# EAGLE board W5200 Ethernet Shield (EAGLE 6.1)
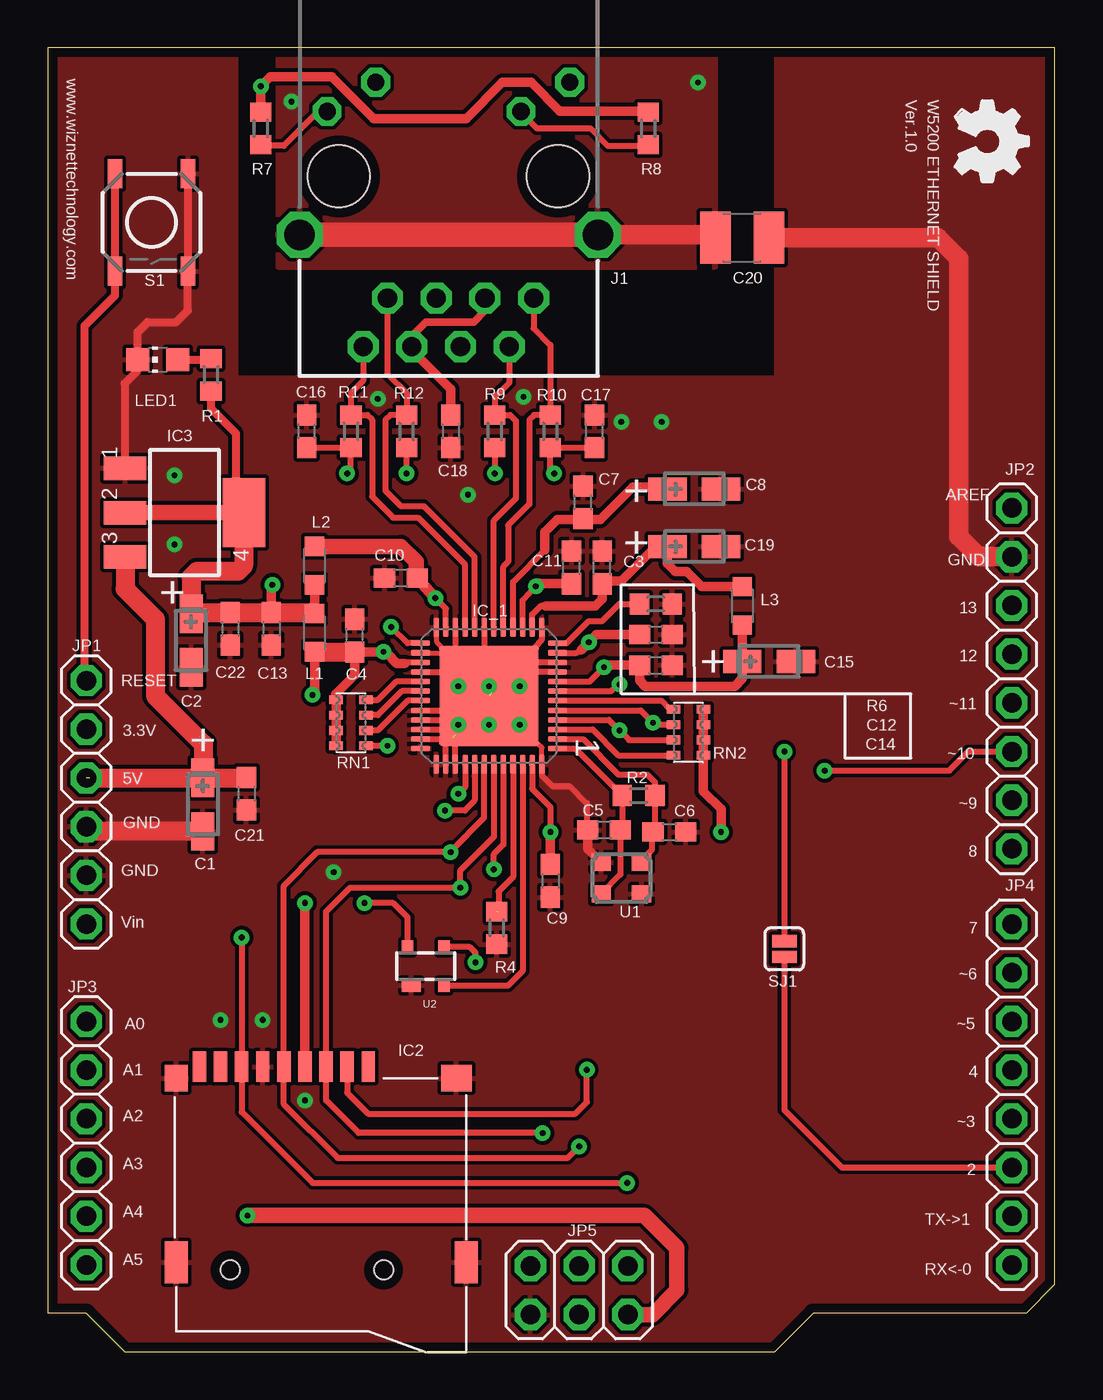
[diagram p0: board, top side]
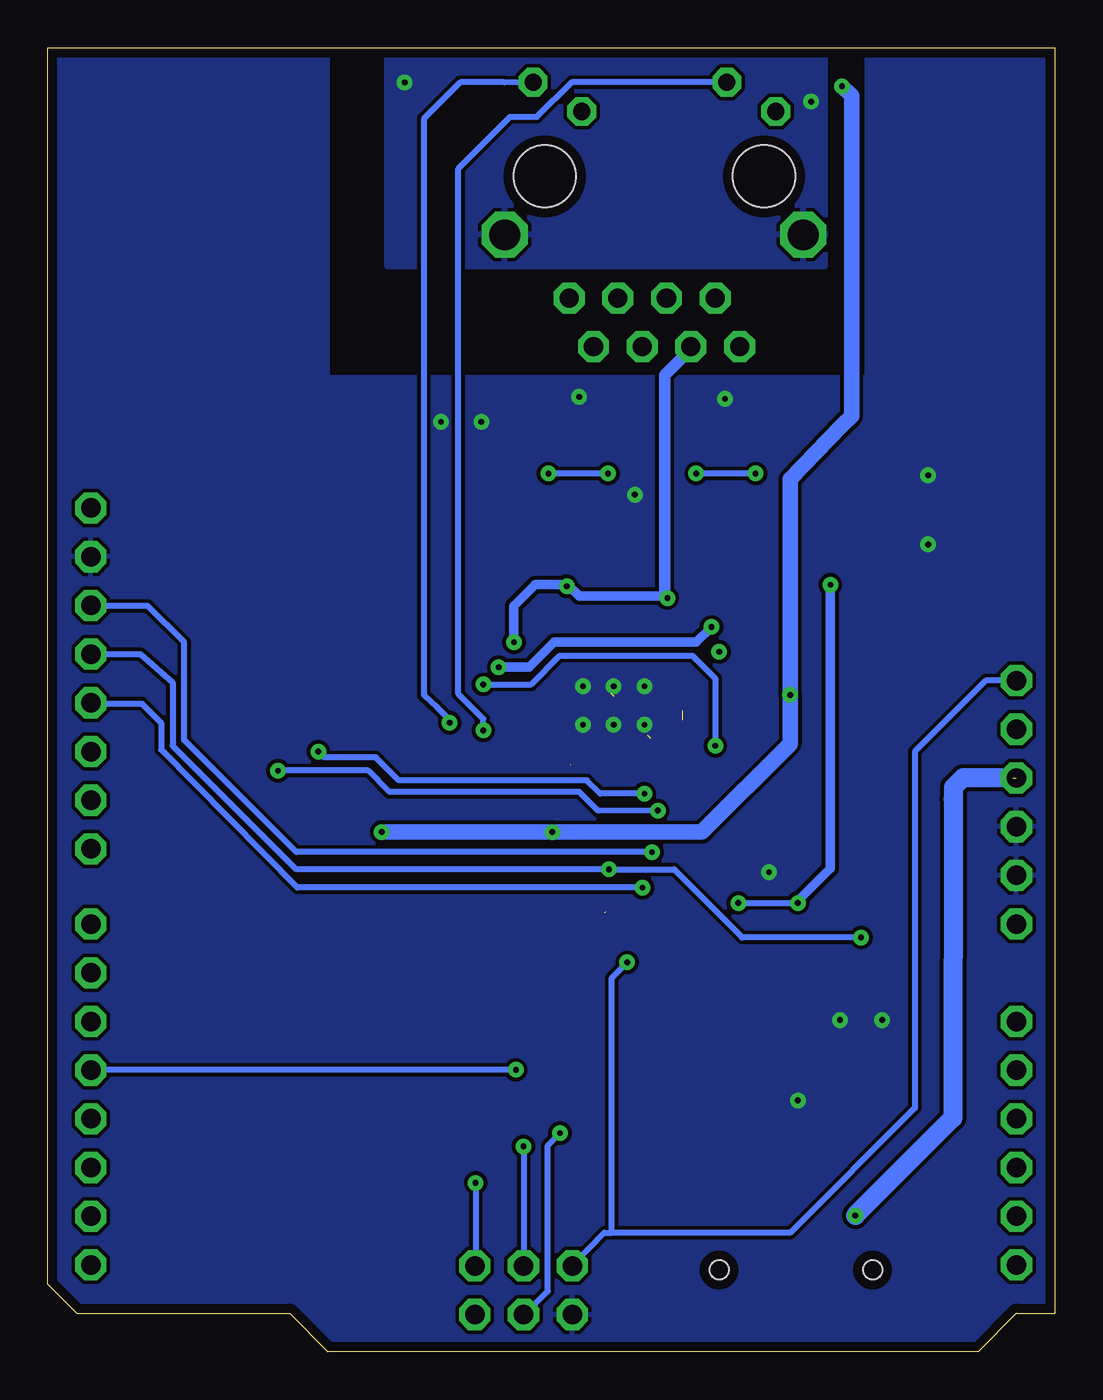
[diagram p1: board, bottom side, seen from below]

Size 52.5 x 68 mm. Coordinates in mm from the lower left corner, seen from the top.
Outline: 4,0 37.9,0 39.9,2 51,2 52.5,3.5 52.5,68 0,68 0,2 2,2 4,0
Copper layers (1*16): Top 0.035mm / dielectric 1.5mm / Bottom 0.035mm
Design rules: minimum track width 8mil, minimum drill 4mil, track to track 0.2mm, track to pad 0.2mm, pad to pad 0.5mm, via to via 0.3mm, smd to smd 6mil, copper to edge 0.5mm, drill to drill 8mil, minimum pad ring 12mil, minimum via ring 10mil, stop-mask expansion 0mil, vias tented up to drill 25mil, thermal gap 0.2mm
Net classes: 0 default: width 0.3 mm, drill 0.3 mm; 1 power: width 0.5 mm, drill 0.5 mm

## Footprints (pad centres in the part's own frame; a part is rotated, then mirrored left to right if it is on the bottom)
CT3216 = smd 2 x 1.2: + -1.4,0; - 1.4,0
C0603 = smd 1.1 x 1: 1 -0.85,0; 2 0.85,0
C3225 = smd 1.6 x 2.7: 1 -1.4,0; 2 1.4,0
MSD_SYMBOL_MSDPAC = smd 0.7 x 1.6: 1 0,0; 2 1.1,0; 3 2.2,0; 4 3.3,0; 5 4.4,0; 6 5.5,0; 7 6.6,0; 8 7.7,0; 9 8.8,0 | smd 1.2 x 1.4: 10 -1.2,-0.6 | smd 1.6 x 1.4: 11 13.4,-0.6 | smd 1.2 x 2.2: 12 13.9,-10.2; 13 -1.2,-10.2 | hole 1: 9.6,-10.6; 1.6,-10.6
SOT223 = smd 1.219 x 2.235: 1 -2.311,-3.099; 2 0,-3.099; 3 2.311,-3.099 | smd 3.6 x 2.2: 4 0,3.099
QFN48 = smd 1 x 0.3: 1 -3.575,2.75; 2 -3.575,2.25; 3 -3.575,1.75; 4 -3.575,1.25; 5 -3.575,0.75; 6 -3.575,0.25; 7 -3.575,-0.25; 8 -3.575,-0.75; 9 -3.575,-1.25; 10 -3.575,-1.75; 11 -3.575,-2.25; 12 -3.575,-2.75; 25 3.575,-2.75; 26 3.575,-2.25; 27 3.575,-1.75; 28 3.575,-1.25; 29 3.575,-0.75; 30 3.575,-0.25; 31 3.575,0.25; 32 3.575,0.75; 33 3.575,1.25; 34 3.575,1.75; 35 3.575,2.25; 36 3.575,2.75 | smd 0.3 x 1: 13 -2.75,-3.575; 14 -2.25,-3.575; 15 -1.75,-3.575; 16 -1.25,-3.575; 17 -0.75,-3.575; 18 -0.25,-3.575; 19 0.25,-3.575; 20 0.75,-3.575; 21 1.25,-3.575; 22 1.75,-3.575; 23 2.25,-3.575; 24 2.75,-3.575; 37 2.75,3.575; 38 2.25,3.575; 39 1.75,3.575; 40 1.25,3.575; 41 0.75,3.575; 42 0.25,3.575; 43 -0.25,3.575; 44 -0.75,3.575; 45 -1.25,3.575; 46 -1.75,3.575; 47 -2.25,3.575; 48 -2.75,3.575 | smd 5.2 x 5.2: EXP 0,0
W5200-ETHERNET-SHIELD_CADNIX_PLACEMENT2_WIZNET_EAGLE_LIB_0.1_MAGJACK = drill 1 pad 1.422 octagon: 1 3.175,17.445; 2 4.445,19.985; 3 5.715,17.445; 4 6.985,19.985; 5 8.255,17.445; 6 9.525,19.985; 7 10.795,17.445; 8 12.065,19.985 | drill 0.89 pad 1.27 octagon: 9 13.945,7.715; 10 11.405,6.195; 11 3.835,7.715; 12 1.295,6.195 | drill 1.6 pad 2.184 octagon: M1 -0.18,14.15; M2 15.38,14.15 | hole 3.25: 1.905,11.095; 13.335,11.095
1X06 = drill 1.016 octagon: 1 -6.35,0; 2 -3.81,0; 3 -1.27,0; 4 1.27,0; 5 3.81,0; 6 6.35,0
1X08 = drill 1.016 octagon: 1 -8.89,0; 2 -6.35,0; 3 -3.81,0; 4 -1.27,0; 5 1.27,0; 6 3.81,0; 7 6.35,0; 8 8.89,0
2X03 = drill 1.016 octagon: 1 -2.54,-1.27; 2 -2.54,1.27; 3 0,-1.27; 4 0,1.27; 5 2.54,-1.27; 6 2.54,1.27
L2012C = smd 1 x 1: 1 -1,0; 2 1,0
CHIP-LED0805 = smd 1.2 x 1.2: A 0,-1.05; C 0,1.05
R0603 = smd 1 x 1.1: 1 -0.85,0; 2 0.85,0
EXBV8V = smd 0.45 x 0.7: 1 -1.2,-0.775; 2 -0.4,-0.775; 3 0.4,-0.775; 4 1.2,-0.775; 5 1.2,0.775; 6 0.4,0.775; 7 -0.4,0.775; 8 -1.2,0.775
TACTILE_SWITCH_SMD = smd 1.524 x 0.762: 1 -2.54,1.905; 2 2.54,1.905; 3 -2.54,-1.905; 4 2.54,-1.905
SJ_2S = smd 0.635 x 1.27: 1 -0.412,0; 2 0.412,0
CRYSTAL = smd 1 x 0.9: 1 -1.05,-0.825; 2 1.05,-0.825; 3 1.05,0.825; 4 -1.05,0.825
SOT143 = smd 1 x 0.7: 1 -0.75,-1 | smd 0.6 x 0.7: 2 0.95,-1; 3 0.95,1; 4 -0.95,1

## Placement (x,y rotation side)
C1  10uF/10V  [CT3216]  8.08,28.53 270 top
C2  10uF/16V  [CT3216]  7.46,37.09 270 top
C3  0.1uF  [C0603]  28.9,40.9 90 top
C4  0.1uF  [C0603]  16,37.35 90 top
C5  18pF  [C0603]  29,27.2 180 top
C6  18pF  [C0603]  32.4,27.1 0 top
C7  0.1uF  [C0603]  27.9,44.3 90 top
C8  10uF/16V (Tantal)  [CT3216]  33.7,45 0 top
C9  0.1uF  [C0603]  26.2,24.55 270 top
C10  0.1uF  [C0603]  18.4,40.35 180 top
C11  0.1uF  [C0603]  27.3,40.9 90 top
C12  0.1uF  [C0603]  31.7,37.4 0 top
C13  0.1uF  [C0603]  11.65,37.7 270 top
C14  0.1uF  [C0603]  31.7,35.8 0 top
C15  10uF/16V (Tantal)  [CT3216]  37.6,36 0 top
C16  0.1uF  [C0603]  13.5,48 90 top
C17  0.1uF  [C0603]  28.5,48 90 top
C18  0.1uF  [C0603]  21,48 270 top
C19  10uF/16V (Tantal)  [CT3216]  33.7,42 0 top
C20  1000pF  [C3225]  36.2,58.1 0 top
C21  1uF  [C0603]  10.35,29.1 270 top
C22  1uF  [C0603]  9.5,37.7 270 top
IC2  MICROSD  [MSD_SYMBOL_MSDPAC]  7.9,14.86 0 top
IC3  LM1117-3.3  [SOT223]  7.12,43.76 270 top
IC_1  W5200  [QFN48]  23,34.2 180 top
J1  MAGJACK  [W5200-ETHERNET-SHIELD_CADNIX_PLACEMENT2_WIZNET_EAGLE_LIB_0.1_MAGJACK]  28.5,72.4 180 top
JP1  Header 6x1  [1X06]  2,28.65 270 top
JP2  Header 8x1  [1X08]  50.26,35.11 90 top
JP3  Header 6x1  [1X06]  2,10.87 270 top
JP4  Header 8x1  [1X08]  50.26,13.41 90 top
JP5  [2X03]  27.7,3.2 180 top
L1  HH-1M1608-121JT  [L2012C]  13.9,37.5 270 top
L2  HH-1M1608-121JT  [L2012C]  13.9,41 90 top
L3  HH-1M1608-121JT  [L2012C]  36.2,38.9 270 top
LED1  SMD RED  [CHIP-LED0805]  5.73,51.74 90 top
R1  200  [R0603]  8.5,50.95 270 top
R2  1M  [R0603]  30.8,29 0 top
R4  10K  [R0603]  23.4,22.1 270 top
R6  28.7K/1%  [R0603]  31.7,39 0 top
R7  200  [R0603]  11.1,63.8 270 top
R8  200  [R0603]  31.3,63.8 270 top
R9  49.9  [R0603]  23.3,48 270 top
R10  49.9  [R0603]  26.2,48 270 top
R11  49.9  [R0603]  15.8,48 270 top
R12  49.9  [R0603]  18.7,48 270 top
RN1  10K  [EXBV8V]  15.8,32.8 90 top
RN2  10K  [EXBV8V]  33.4,32.3 270 top
S1  [TACTILE_SWITCH_SMD]  5.4,58.9 270 top
SJ1  SOLDERJUMPERNC  [SJ_2S]  38.4,21 90 top
U1  25Mhz  [CRYSTAL]  29.9,24.7 0 top
U2  MIC811SU  [SOT143]  19.7,20.1 0 top
U$1  [OSHW_FILLX150_NOTEXT]  47.3,65.25 270 top

## Library data of the parts
C1-C22 L1-L3 = rcl
IC2 = _SRAW5200 Ethernet shield_CADNIX_placement2_1
IC3 = linear
IC_1 = 2012-11-07_WIZnet_5_11_0
J1 = W5200 Ethernet shield_CADNIX_placement2_1
JP1-JP5 = pinhead
LED1 = led
R1 R2 R4 R6-R12 = resistor
RN1 RN2 = resistor-dil; OC_FARNELL: unknown; OC_NEWARK: unknown
S1 SJ1 U2 = SparkFun
U1 = 2012-11-07_WIZnet_5_11_0; OC_FARNELL: unknown; OC_NEWARK: unknown
U$1 = OSHW

## Nets
+3V3 [power]: C2.+ C13.1 C22.1 IC2.6 IC3.2 IC3.4 L1.1 L2.1 R1.2 U2.4
+5V [power]: C1.+ C21.1 IC3.3 JP1.3 JP5.2
/INT: IC_1.40 SJ1.2
/LINK_LED: IC_1.5 J1.12 RN2.2
/RST: IC_1.46 U2.2
/SCS: IC_1.41 JP2.3
/SPD_LED: IC_1.4 J1.10 RN2.3
/SS_SD: IC2.8 JP4.5
GND [power]: C1.- C2.- C3.2 C4.2 C5.2 C6.2 C7.2 C8.- C9.2 C10.2 C11.2 C12.2 C13.2 C14.2 C15.- C16.2 C17.2 C18.2 C19.- C20.2 C21.2 C22.2 IC2.4 IC2.10 IC2.11 IC2.12 IC2.13 IC3.1 IC_1.9 IC_1.10 IC_1.13 IC_1.19 IC_1.22 IC_1.24 IC_1.26 IC_1.28 IC_1.32 IC_1.33 IC_1.34 IC_1.35 IC_1.36 IC_1.37 IC_1.38 IC_1.39 IC_1.48 IC_1.EXP JP1.4 JP1.5 JP2.7 JP5.6 LED1.C R4.2 R6.2 S1.1 S1.2 U1.2 U1.4 U2.1
GNDA: C20.1 J1.M1 J1.M2
MISO: IC2.3 IC_1.44 JP2.5 JP5.1
MOSI: IC2.7 IC_1.43 JP2.4 JP5.4
N$1: JP4.3 SJ1.1
N$2: IC_1.31 RN1.2
N$3: C6.1 IC_1.2 R2.2 U1.3
N$4: C5.1 IC_1.1 R2.1 U1.1
N$5: IC_1.30 RN1.3
N$6: IC_1.29 RN1.4
N$7: J1.9 R7.2
N$8: J1.11 R8.2
N$10: IC_1.7 RN1.1
N$12: IC_1.12 R6.1
N$13: C7.1 C8.+ IC_1.16
N$14: C17.1 R9.2 R10.2
N$15: LED1.A R1.1
N$16: C16.1 R11.2 R12.2
N$17: IC_1.6 RN2.1
N$20: IC_1.3 RN2.4
PWDN: IC_1.45 R4.1
RESET: JP1.1 JP5.5 S1.3 S1.4 U2.3
RXIN: IC_1.21 J1.8 R11.1
RXIP: IC_1.20 J1.7 R12.1
SCLK: IC2.5 IC_1.42 JP2.6 JP5.3
TXON: IC_1.18 J1.2 R9.1
TXOP: IC_1.17 J1.1 R10.1
VCC1V8 [power]: C14.1 C15.+ IC_1.8 IC_1.25 L3.2
VCC1V8_OUT [power]: C3.1 C19.+ IC_1.14 L3.1
VCC3V3 [power]: C4.1 C9.1 IC_1.27 IC_1.47 L1.2 R7.1 R8.1 RN1.5 RN1.6 RN1.7 RN1.8 RN2.5 RN2.6 RN2.7 RN2.8
VCC3V3A [power]: C10.1 C11.1 C12.1 C18.1 IC_1.11 IC_1.15 IC_1.23 J1.3 J1.6 L2.2

## Tracks (layer width: path | path; a pad name or v marks a point on that pad's centre or on a via)
+3V3  (via drill 0.3)
  Top 0.3: U2.4 18.75,22.65 18,23.4 v16.5,23.4
  Top 0.406: R1.2 8.5,49.2 9.8,47.9 9.8,44.18 IC3.4
  Top 0.5: IC3.4 10.2,43.76 | 7.86,38.55 C2.+ | L2.1 L1.1 | C13.1 11.65,39.85 v11.7,40 | v13.4,23.4 IC2.6
  Top 0.813: IC3.4 IC3.2
  Top 1: 10.2,43.76 10.2,41 9.9,40.7 7.76,40.7 7.46,40.4 C2.+ | 7.86,38.55 C22.1 C13.1 13.75,38.55 L1.1
  Bottom 0.3: v16.5,23.4 v13.4,23.4
  Bottom 0.5: v11.7,40 11.7,25.2 13.5,23.4 13.5,23.5 v13.4,23.4
+5V  (via drill 0.3)  (1 unrouted)
  Top 0.5: 8.1,29.95 C1.+
  Top 0.8: JP5.2 31.53,1.93 32.8,3.2 32.8,5.4 31.1,7.1 v10.4,7.1
  Top 0.813: 8.17,29.92 C1.+
  Top 1: JP1.3 8.17,29.92 10.32,29.92 C21.1 | IC3.3 4.02,39.78 5.6,38.2 5.6,34.2 8.1,31.7 8.1,29.95
  Bottom 1: 2.19,29.92 4.79,29.92 5.29,29.43 5.3,28.8 5.32,12.18 v10.4,7.1
/INT  (via drill 0.3)
  Top 0.3: IC_1.40 21.75,29.45 v21.4,29.1 | v38.4,31.3 SJ1.2
  Bottom 0.3: v21.4,29.1 23.7,29.1 24.4,29.8 34.2,29.8 35.4,31 38.1,31 v38.4,31.3
/LINK_LED  (via drill 0.3)
  Top 0.3: IC_1.5 30.9,33.45 v31.55,32.8 31.5,32.9 31.7,32.7 RN2.2
  Bottom 0.3: J1.12 27.2,66.19 28,66.19 28.7,66.2 31,66.2 32.9,64.3 32.9,34.25 32.2,33.6 31.5,32.9 v31.55,32.8
/RST
  Top 0.3: IC_1.46 24.75,19.85 24,19.1 U2.2
/SCS  (via drill 0.3)
  Top 0.3: 22.25,30 IC_1.41 22.25,28.75 21.74,28.22 v20.7,28.22 | v40.5,30.3 47,30.3 48,31.3 JP2.3
  Bottom 0.3: v20.7,28.22 23.8,28.2 24.8,29.2 34.7,29.2 35.8,30.3 v40.5,30.3
/SPD_LED  (via drill 0.3)
  Top 0.3: IC_1.4 29.25,32.95 v29.8,32.4 30.3,31.9 RN2.3
  Bottom 0.3: v29.8,32.4 29.8,33 31.1,34.3 31.1,61.7 28.4,64.4 27,64.4 25.2,66.2 J1.10
/SS_SD  (via drill 0.3)
  Top 0.3: IC2.8 15.6,13.5 16.7,12.4 27.5,12.4 28.1,13 v28.1,14.7
  Bottom 0.3: v28.1,14.7 50.24,14.7 JP4.5
GND  (via drill 0.3)  (3 unrouted)
  Top 0.25: IC_1.24 20.25,37.05 20.95,36.35 | IC_1.48 25.75,31.5 23.5,33.4 | IC_1.26 21.04,36.45 21.04,36.38
  Top 0.3: IC_1.10 24.75,35.95 | 24.75,35.95 24.25,35.45 | IC_1.9 24.25,35.45 | 24.25,35.45 23.15,34.35 23,34.85 22.75,34.45 IC_1.19 | IC_1.13 25.75,37.15 24.75,35.95 | IC_1.28 21.75,35.45 | 20.95,36.35 21.04,36.38 21.25,36.45 | 21.25,36.45 23.3,34.4 | IC_1.22 21.25,36.45 | 21.25,36.45 21.25,35.85 23.5,33.6 23.5,33.4 | 20.85,31.95 21.5,32.6 | IC_1.38 20.75,32 20.75,32.45 21.8,33.5 | IC_1.48 25.75,30.05 26.3,29.5 27.2,29.5 28.1,28.6 28.1,27.25 C5.2 | IC_1.39 21.25,32.15 21.2,32.2 | IC_1.35 21.05,31.95 21.1,32 | IC_1.34 20.85,32.45 20.9,32.4 | IC_1.33 20.65,32.95 20.7,33 | IC_1.32 20.96,33.45
  Top 0.406: IC3.1 4,46.09 4,50.5 4.68,51.18 LED1.C 4.68,53.18 5.2,53.7 6.7,53.7 7.3,54.3 7.3,56.3 | S1.2 S1.1
  Top 0.5: 21.75,35.45 23,34.85 | 23.3,34.4 23.2,34.4 23.15,34.35 | 21.75,33.45 21.8,33.5 | 20.85,31.95 20.8,31.95 20.75,32 | 21.25,35.85 21.25,36.2 20.95,36.35 | 28,27.35 C5.2 28.15,26.23 U1.4
  Top 0.813: 2.25,27.13 JP1.4
  Top 1: C1.- 2.25,27.13
  Top 1.016: JP2.7 48.54,41.46 47.5,42.5 47.5,57 46.4,58.1 C20.2 | C20.2
  other vias: 14.9,25 9,17.3 11.2,17.3 13.4,13.1 24.8,49.8 6.6,42.1 21.4,32.7 23,32.7 24.6,32.7 24.6,34.7 23,34.7 21.4,34.7 32,48.5 6.6,45.7 21.9,44.7 29.9,48.5 17.2,49.7
  pour Bottom: 0,67.9 9.8,67.9 9.8,67.4 9.8,50.8 37.9,50.8 37.9,68 52.5,68 52.5,67.9 52.6,67.9 52.6,0 0,0
  pour Top: 0,67.9 9.8,67.9 9.8,50.8 38,50.8 38,67.9 52.6,67.9 52.6,-0.2 0,-0.2 0,67.8
GNDA  (via drill 0.3)
  Top 1.016: J1.M1 34.8,58.25 C20.1
  Top 1.27: J1.M2 J1.M1
  other vias: 33.9,66.2 12.7,65.2
  pour Bottom: 12,67.9 12,56.6 34.8,56.6 34.8,67.9
  pour Top: 12,67.8 12,56.6 34.8,56.6 34.8,67.8
MISO  (via drill 0.3)
  Top 0.3: v30.2,8.8 13.8,8.8 10.1,12.5 IC2.3 v10.1,21.6 | v23.25,25.15 23.25,25.95 23.75,26.45 IC_1.44
  Bottom 0.3: v30.2,8.8 30.2,4.51 JP5.1 | v10.1,21.6 16.3,21.6 19.85,25.15 v23.25,25.15 39.55,25.15 46,31.6 46,34.9 47.68,36.38 JP2.5
MOSI  (via drill 0.3)
  Top 0.3: v25.8,11.4 16.2,11.4 14.5,13.1 IC2.7 14.5,22.95 15.75,24.2 v21.5,24.2 21.5,25.1 23.25,26.85 IC_1.43
  Bottom 0.3: JP5.4 27.67,1.93 26.43,3.17 26.43,10.77 v25.8,11.4 | JP2.4 50.22,33.8 47.6,33.8 46.6,32.8 46.6,31.4 39.5,24.2 v21.5,24.2
N$1
  Top 0.3: SJ1.1 38.4,12.6 41.4,9.6 JP4.3
N$2
  Top 0.3: IC_1.31 18.75,33.95 17.2,32.4 RN1.2
N$3
  Top 0.3: IC_1.2 27.9,31.95 29.75,30.1 31.25,30.1 31.65,29.7 R2.2 | 31.45,29.2 R2.2 | U1.3 30.93,25.62 31.5,26.2 31.5,27.45 C6.1 31.65,27.6 R2.2
N$4
  Top 0.3: IC_1.1 27.5,31.45 R2.1 29.95,27.6 C5.1 29.85,24.88 U1.1
N$5
  Top 0.3: IC_1.30 18.45,34.45 17.2,33.2 RN1.3
N$6
  Top 0.3: RN1.4 17.2,34 18.15,34.95 IC_1.29
N$7
  Top 0.3: J1.9 14.47,64.6 14,64.6 12.3,62.9 11.15,62.9 R7.2
N$8
  Top 0.3: J1.11 24.66,64.64 25.5,63.8 28.3,63.8 29.2,62.9 31.25,62.9 R8.2
N$10  (via drill 0.3)
  Top 0.3: IC_1.7 29.35,34.45 v29.8,34.8 | v17.7,31.6 RN1.1
  Bottom 0.3: v29.8,34.8 27.3,34.8 25.8,36.3 18.9,36.3 17.7,35.1 v17.7,31.6
N$12
  Top 0.3: R6.1 29.8,39 28.9,38.1 28.2,38.1 27.05,36.95 IC_1.12
N$13
  Top 0.3: IC_1.16 24.25,40.15 25.9,41.8 | 27.9,43.4 C7.1 | C8.+ 32.2,45.1
  Top 0.5: 25.9,41.8 25.9,42.75 26.55,43.4 27.9,43.4 28.8,43.4 30.5,45.1 32.2,45.1
N$14  (via drill 0.3)
  Top 0.3: R9.2 v23.3,45.8 | v26.4,45.8 26.2,46 R10.2 28.45,47.15 28.5,47.1 C17.1
  Bottom 0.3: v23.3,45.8 v26.4,45.8
N$15
  Top 0.406: LED1.A 8.44,51.74 R1.1
N$16  (via drill 0.3)
  Top 0.3: C16.1 15.75,47.15 | 15.75,47.15 15.8,47.2 R11.2 15.8,46 v15.6,45.8 | 15.75,47.15 15.7,47.1 15.8,47.1 | 18.5,47.2 R12.2 v18.7,45.8
  Bottom 0.3: v15.6,45.8 v18.7,45.8
N$17
  Top 0.3: IC_1.6 32,33.95 32.45,33.5 RN2.1
N$20
  Top 0.3: IC_1.3 28.4,32.45 29.75,31.1 RN2.4
PWDN  (1 unrouted)
  Top 0.3: IC_1.45 24.25,24.75 23.5,24 23.5,22.9
RESET  (via drill 0.3)
  Top 0.3: v22.3,20.3 22.3,20.8 22,21.1 U2.3
  Top 0.406: JP1.1 1.9,35.1 1.9,53.5 3.5,55.1 S1.4 | S1.3 S1.4 | S1.4 3.5,56.45
  Bottom 0.3: JP1.1 3.6,35 7.3,31.3 7.3,12.7 13.8,6.2 23.1,6.2 | JP5.5 23.49,6.2 23.1,6.2 | 23.1,6.2 23.1,19.5 v22.3,20.3
RXIN
  Top 0.3: IC_1.21 21.75,41.05 19.3,43.5 18,43.5 16.9,44.6 16.9,48.6 16.65,48.85 R11.1 15.8,50 16.43,50.63 J1.8
RXIP
  Top 0.3: IC_1.20 22.25,41.45 19.6,44.1 18.4,44.1 17.6,44.9 17.6,48.6 17.85,48.85 R12.1 18.7,50 17.7,50.99 J1.7
S$2
  cutout Bottom: 13.2,51 28.5,51 arc3
S$3
  cutout Top: 20,37.2 20,33.48 20,33.54 19.27,33.54 19.27,31.67 19.24,31.67 19.24,31.68 20.01,31.68 20.01,31.3 20,31.3 20.6,31.3 20.6,30.4 21.4,30.4 21.4,31.3 26,31.3 26,35.4 26.7,35.4 26.7,35.9 26,35.9 26,37.2
SCLK  (via drill 0.3)
  Top 0.3: IC_1.42 22.75,27.85 21.05,26.15 v21,26.05 14.05,26.05 12.3,24.3 IC2.5 12.3,12.9 15.1,10.1 27.1,10.1 v27.7,10.7
  Bottom 0.3: v27.7,10.7 JP5.3 | JP2.6 50.24,38.9 47.3,38.9 45.4,37 45.4,31.9 39.55,26.05 v21,26.05 21,26.1
TXON
  Top 0.3: IC_1.18 23.25,43.35 24.4,44.5 24.4,48.55 24.1,48.85 R9.1 23.3,49.8 24.05,50.55 J1.2
TXOP
  Top 0.3: IC_1.17 23.75,40.95 24,41.2 24,43.1 25.1,44.2 25.1,48.6 25.35,48.85 R10.1 26.2,52.5 25.32,53.38 J1.1
VCC1V8  (via drill 0.3)
  Top 0.3: 30.85,35.3 30.35,35.8 | 30.78,35.8 C14.1 | IC_1.25 18.75,36.95 v17.9,37.8 | 29.1,35.8 v29,35.7 28.25,34.95 IC_1.8
  Top 0.5: L3.2 C15.+ 36.2,35.1 35.8,34.7 31.15,34.7 30.85,35 30.85,35.3 C14.1 | 29.1,35.8 30.35,35.8
  Bottom 0.5: v17.9,37.8 18.7,37 26.1,37 27.4,35.7 v29,35.7
VCC1V8_OUT
  Top 0.3: IC_1.14 25.25,38.45 25.7,38.9 25.95,38.9
  Top 0.5: 25.95,38.9 28.55,38.9 28.9,39.25 C3.1 29.05,40.2 29.9,40.2 31.7,42 C19.+ 32.3,41.1 32.7,40.7 33.3,40.7 34.1,39.9 L3.1
VCC3V3  (via drill 0.3)  (1 unrouted)
  Top 0.3: IC_1.27 18.25,35.95 18.2,35.9 | 25.25,30.6 25.25,29.35 26.2,28.4 v26.2,27.1
  Top 0.5: RN1.8 RN1.7 RN1.6 RN1.5 15,34.02 15,34.3 16,35.3 C4.1 v17.5,36.5 17.7,36.4 18.2,35.9 18.6,35.9 | RN2.8 RN2.7 RN2.6 34.17,31.12 | 34.17,31.12 34.2,31.1 RN2.5 | 34.17,31.12 34.17,29.23 35.1,28.3 v35.1,27.1 | L1.2 13.9,34.4 v13.8,34.25 | v26.2,27.1 C9.1 | R7.1 v11.1,66 11.6,66.5 14.8,66.5 17,64.3 21.8,64.3 23.7,66.2 25.2,66.2 26.7,64.7 31.25,64.7 R8.1
  Top 1: L1.2 C4.1
  Bottom 0.8: v35.1,27.1 v26.2,27.1 18.4,27.1 13.8,31.7 v13.8,34.25 13.8,45.5 11.1,48.3 10.6,48.8 10.6,65.5 v11.1,66
VCC3V3A  (via drill 0.3)
  Top 0.3: IC_1.15 24.75,39.2 v25.44,39.92 25.6,40.1 | IC_1.11 27.55,36.45 27.8,36.6 | IC_1.23 20.75,38.75 v20.2,39.3
  Top 0.4: J1.3 22.79,54.28 22.2,53.7 19.7,53.7 18.98,52.98 J1.6
  Top 0.5: C11.1 25.6,40.05 25.6,40.1 | J1.6 18.98,52.23 21,50.2 C18.1 | 19.2,40.35 C10.1 | C12.1 28.6,37.4 v28.2,37 27.8,36.6
  Top 0.6: C10.1 19.7,39.85 20.1,39.4 v20.2,39.3
  Top 0.8: 19.2,40.35 19.2,41.2 18.4,42 L2.2
  Bottom 0.5: v20.2,39.3 20.35,39.4 24.8,39.4 25.34,39.94 v25.44,39.92 25.5,39.98 25.5,40 27.1,40 28.2,38.9 v28.2,37 | 18.98,52.3 J1.6
  Bottom 0.6: 20.35,39.4 20.35,50.92 18.98,52.3

## Text on the board
tNames: www.wiznettechnology.com | Ver.1.0 | W5200 ETHERNET SHIELD | + | AREF | + | GND | + | 13 | 12 | RESET | + | ~11 | 3.3V | 1 | + | ~10 | 5V | ~9 | GND | 8 | GND | Vin | 7 | ~6 | A0 | ~5 | A1 | 4 | A2 | ~3 | A3 | 2 | A4 | TX->1 | A5 | RX<-0